# Altium PCB PCB(改版20231122）.PcbDoc
Units mil, origin at the board's own origin, x right, y up, seen from the top; angles counter-clockwise.
Board outline 3903.82 x 2740.03 mil, 2 copper layers (Top Layer, Bottom Layer); 31 components, 55 nets, 141 pads, 3 vias.
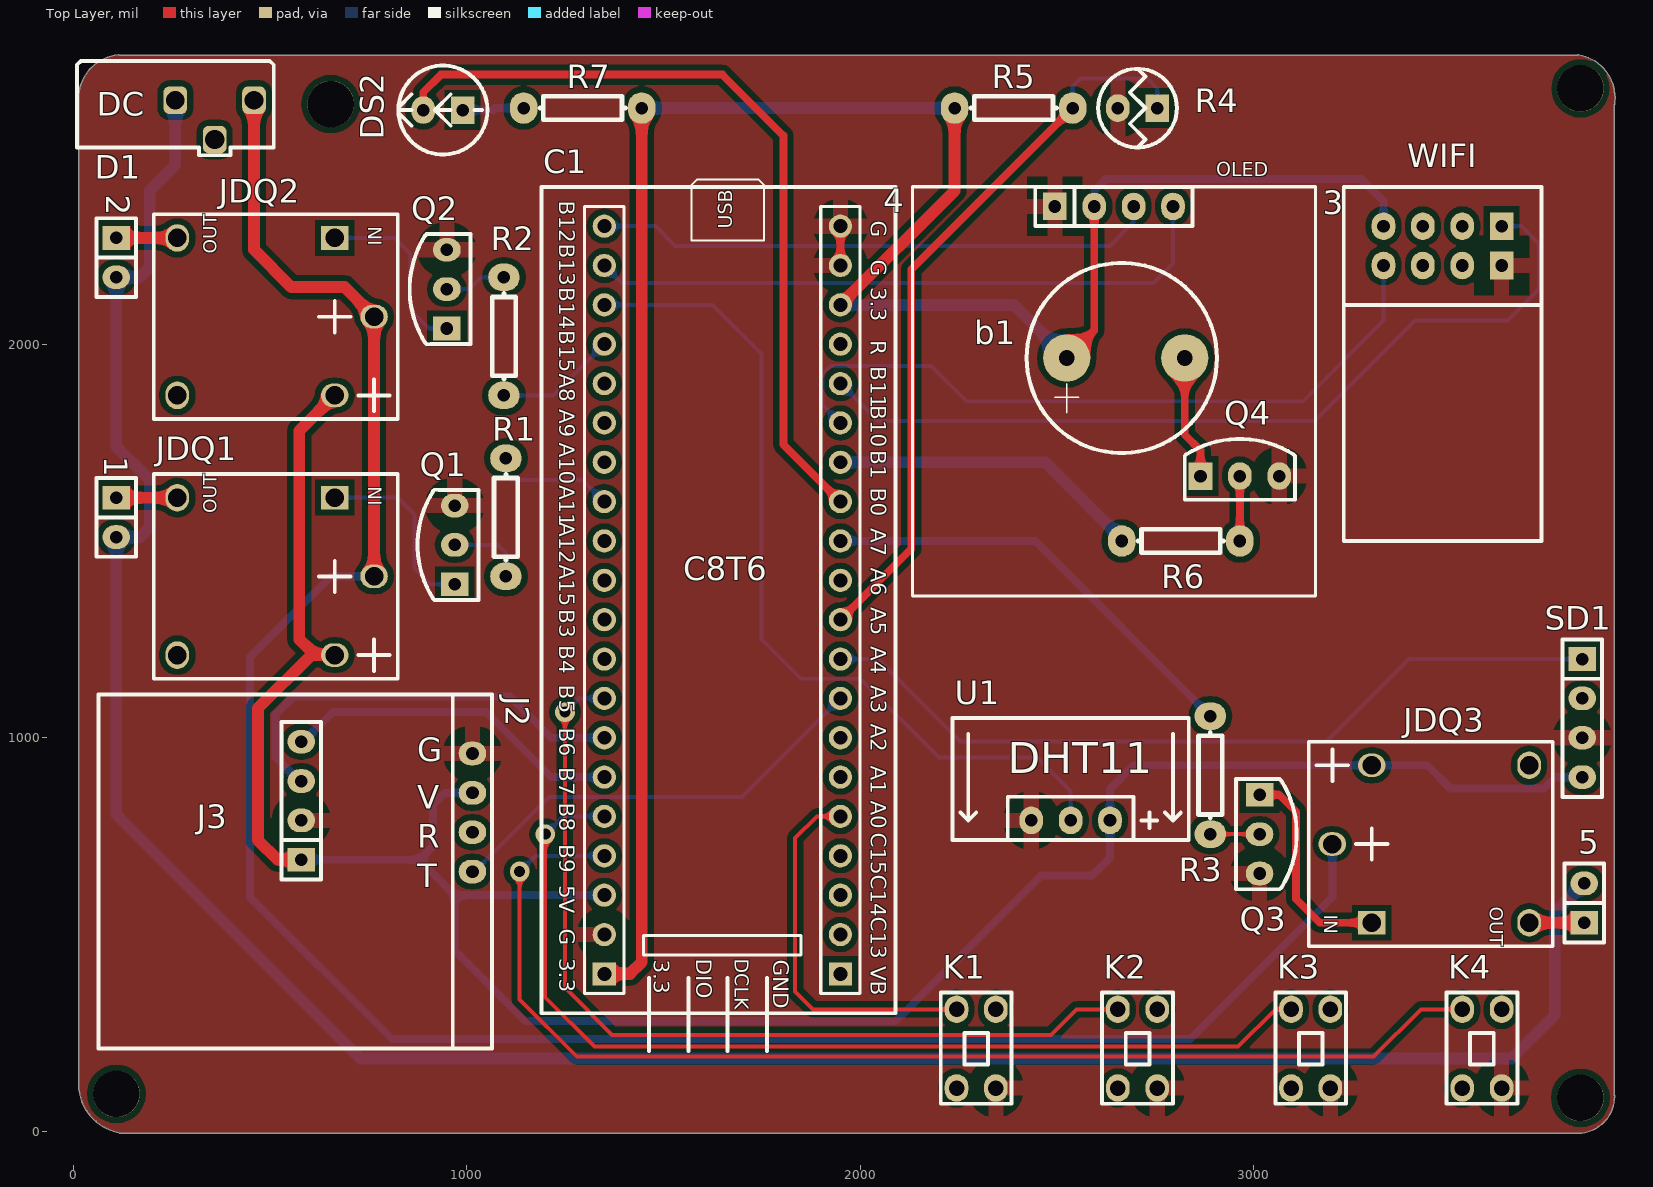
[diagram p0: Top Layer view]
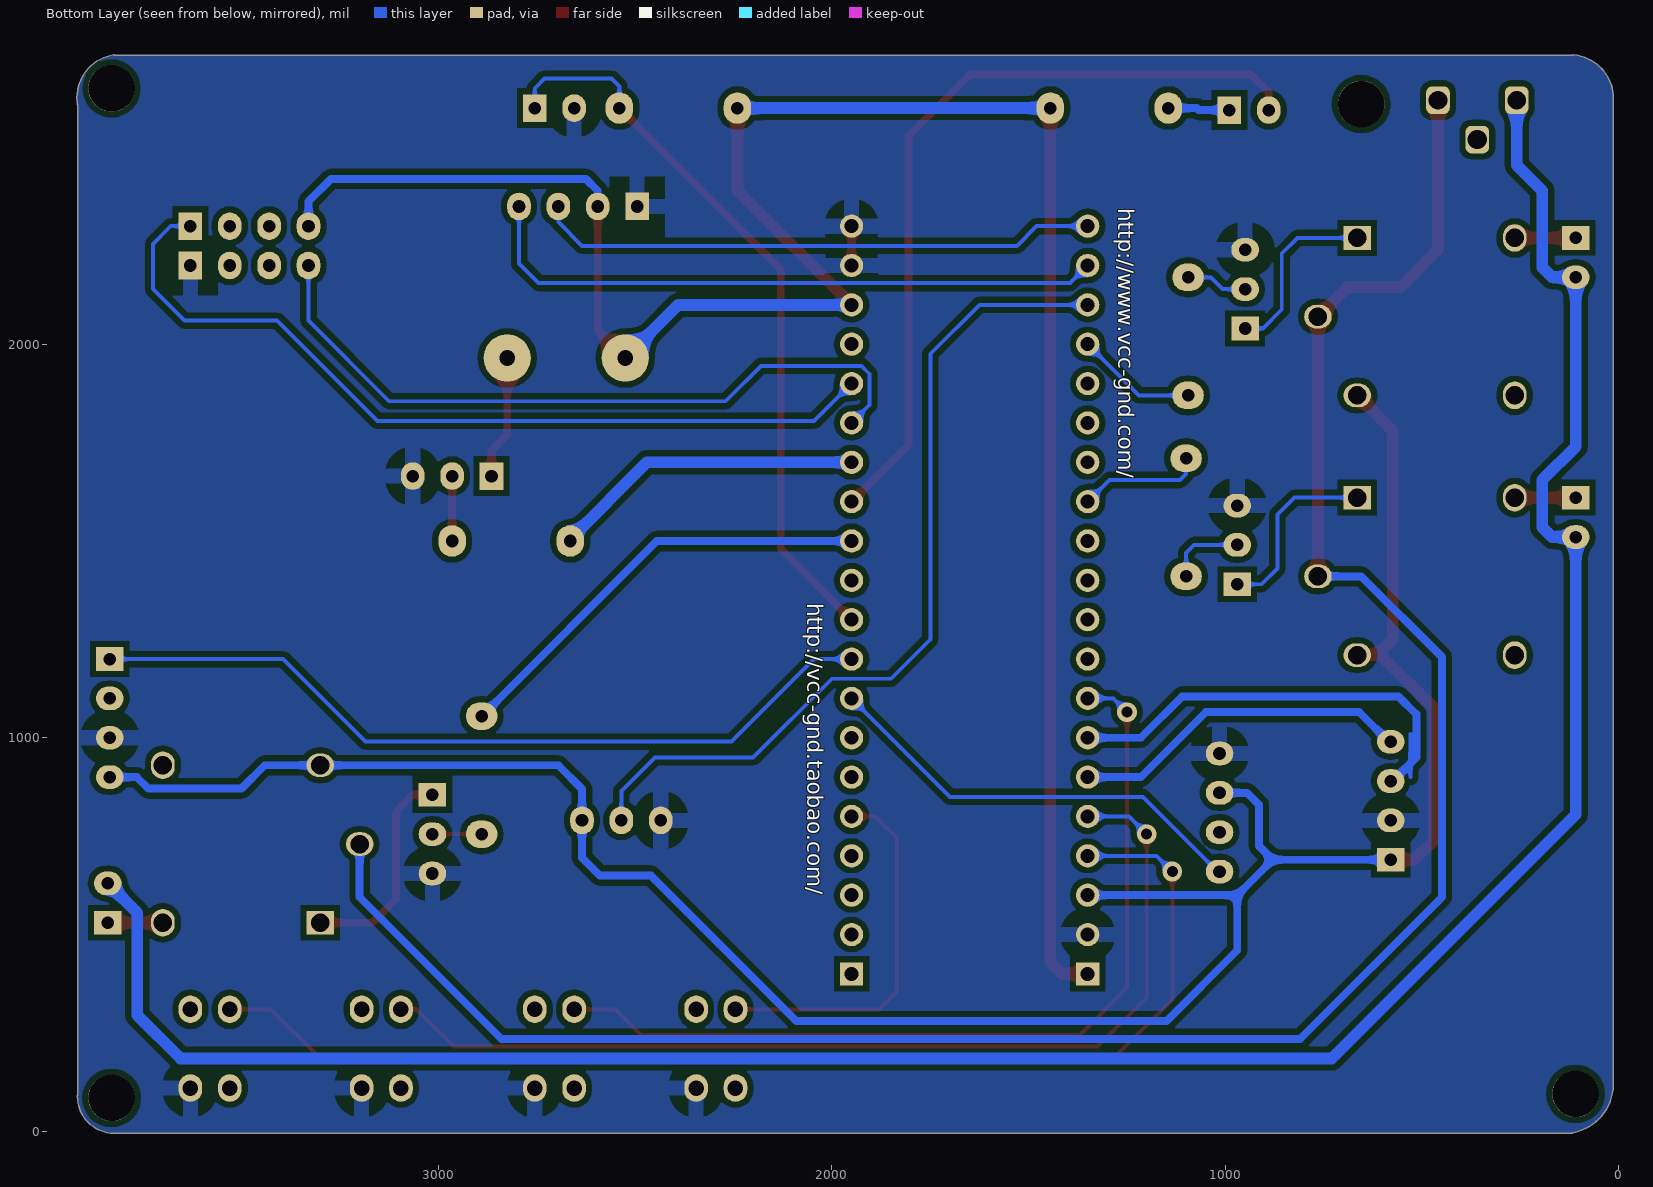
[diagram p1: Bottom Layer view, seen from below]

## Layer stack, top to bottom
Top Solder: solder mask 0.4, Solder Resist, Dk 3.5
Top Layer: signal copper 1.4
Dielectric 1: dielectric 12.6, FR-4, Dk 4.8
Bottom Layer: signal copper 1.4
Bottom Solder: solder mask 0.4, Solder Resist, Dk 3.5

## Board outline
116.43,-3.26 cw(c139.27,119.27) 15,128.92 cw(c20,128.53) 15.16,129.85 15.16,2613.68 cw(c20,2615) 15.01,2614.52 cw(c125,2625) 114.52,2734.99 cw(c115,2730) 116.32,2734.84 3823.68,2734.84 cw(c3825,2730) 3825.79,2734.95 cw(c3808.5,2626.5) 3918.33,2626.5 cw(c3808.5,2626.5) 3916.96,2609.21 cw(c3912.01,2610) 3916.85,2608.68 3916.85,91.32 cw(c3912.01,90) 3917.02,90.08 cw(c3823.5,88.5) 3917.04,88.5 cw(c3823.5,88.5) 3825.08,-5.01 cw(c3825,0) 3823.68,-4.84 131.32,-4.84 cw(c130,0) 129.61,-5 cw(c139.27,119.27) 127.71,-4.84 120,-4.84 cw(c120,0)

## Design rules (kind name [scope] priority, off if disabled: settings)
Clearance [All] p1: gap=15 ignorepadtopadclearanceinfootprint=FALSE
DiffPairsRouting [All] p1: maxlimit=10 minlimit=10 mostfreqgap=10 toplayer_minwidth=15 toplayer_maxwidth=100 toplayer_prefwidth=15 bottomlayer_minwidth=15 bottomlayer_maxwidth=100 bottomlayer_prefwidth=15 maxuncoupledlength=500
PolygonConnect [All] p1: connectstyle=Relief reliefconductorwidth=40 reliefentries=4 polygonreliefangle="90 Angle" airgapwidth=40
RoutingVias [All] p1: holewidth=28 width=50 viastyle="Through Hole" minholewidth=28 minwidth=50 maxholewidth=28 maxwidth=50
SolderMaskExpansion [All] p1: expansion=4
Width Width_3 [InNet('VCC3.3')] p1: maxlimit=100 minlimit=20 preferedwidth=20
Width Width_2 [InNet('VCC')] p2: maxlimit=100 minlimit=20 preferedwidth=20
Width Width_1 [InNet('GND')] p3: maxlimit=100 minlimit=20 preferedwidth=20
Width [All] p4: maxlimit=100 minlimit=10 preferedwidth=20
29 further rules are at their usual default settings.

## Components (designator, comment, footprint, x,y, rotation, side; value= is the part's Value field where it differs from the comment)
1 "排扇" SIP2 110,1560 r270 top
2 "水泵" SIP2 110,2220 r270 top
3 "CK" ESP-01S 3630,2300 r180 top
4 "OLED屏幕" OLED 2645,2350 r0 top
5 "水泵" SIP2 3840,580 r90 top
b1 "BELL" bell 2665,1965 r180 top
C1 "核心板" C8T6核心板 1190,300 r0 top
D1 "DC" DC3.5-1.3 0,2460 r0 top
DS2 "照明灯" "LED - duplicate1" 1060,2715 r180 top
J2 "CON4" JW01 1015,1100 r0 top locked
J3 "CON4" SIP4 580,840 r90 top
JDQ1 "继电器" 5继电器 665,1210 r90 top
JDQ2 "继电器" 5继电器 665,1870 r90 top
JDQ3 "继电器" 5继电器 3300,930 r270 top
K1 "KEY" KeyA 2205,350 r0 top
K2 "KEY" KeyA 2615,350 r0 top
K3 "KEY" KeyA 3055,350 r0 top
K4 "KEY" KeyA 3490,350 r0 top
Q1 "NPN" S9013 970,1390 r90 top
Q2 "NPN" S9013 950,2040 r90 top
Q3 "NPN" S9013 3015,855 r270 top
Q4 "NPN" S9013 2865,1665 r0 top
R1 "330R" AXIAL0.3 1100,1560 r270 top
R2 "330R" AXIAL0.3 1095,2020 r90 top
R3 "330R" AXIAL0.3 2890,905 r270 top
R4 "光敏电阻" GM_R 2825,2660 r180 top
R5 "10K" AXIAL0.3 2390,2600 r180 top
R6 "330R" AXIAL0.3 2815,1500 r0 top
R7 "330欧" AXIAL0.3 1295,2600 r180 top
SD1 "SD" SIP4 3835,1050 r270 top
U1 "DHT11" DHT11 2175,730 r0 top

## Footprints (in the part's own frame and the unit in brackets; to place one, negate y for a bottom-side part, rotate by r counter-clockwise, add the part's x,y. Pads: shape width x height; smd on the part's side, far side on the other; paste and mask are expansions set on the pad)
5继电器 [mil]
  rect 60x70 hole 47: 1(400,0)
  oval 60x70 hole 47: 2(200,-100) 3(0,0)
  oval 70x60 hole 47: 4(400,400) 5(0,400)
  silkscreen extent -60,-160 460,460
AXIAL0.3 [mil]
  oval 70x80 hole 32: 1(-150,0) 2(150,0)
  silkscreen extent -109,-30 109,30
bell [mil]
  round 120 hole 40: 1(-160,0) 2(140,0)
  silkscreen extent -242,-242 242,242
C8T6核心板 [mm]
  round 1.5 hole 0.9: 1(4.064,50.8) 2(4.064,48.26) 3(4.064,45.72) 4(4.064,43.18) 5(4.064,40.64) 6(4.064,38.1) 7(4.064,35.56) 8(4.064,33.02) 9(4.064,30.48) 10(4.064,27.94) 11(4.064,25.4) 12(4.064,22.86) 13(4.064,20.32) 14(4.064,17.78) 15(4.064,15.24) 16(4.064,12.7) 17(4.064,10.16) 18(4.064,7.62) 19(4.064,5.08) 22(19.304,5.08) 23(19.304,7.62) 24(19.304,10.16) 25(19.304,12.7) 26(19.304,15.24) 27(19.304,17.78) 28(19.304,20.32) 29(19.304,22.86) 30(19.304,25.4) 31(19.304,27.94) 32(19.304,30.48) 33(19.304,33.02) 34(19.304,35.56) 35(19.304,38.1) 36(19.304,40.64) 37(19.304,43.18) 38(19.304,45.72) 39(19.304,48.26) 40(19.304,50.8)
  rect 1.5x1.5 hole 0.9: 20(4.064,2.54) 21(19.304,2.54)
  silkscreen extent 0,0 22.86,53.34
DC3.5-1.3 [mil]
  rrect50% 60x70 hole 47.24: 1(460,160) 3(260,160)
  rrect50% 60x70 hole 49.21: 2(360,60)
  silkscreen extent 10,20 510,260
DHT11 [mil]
  oval 60x70 hole 32: 1(460,60) 2(360,60) 3(260,60)
  silkscreen extent 60,10 660,320
ESP-01S [mil]
  oval 60x70 hole 32: 1(300,100) 4(300,0) ""(100,100) ""(100,0) ""(200,0) ""(200,100)
  rect 60x70 hole 32: 2(0,0) 3(0,100)
  silkscreen extent -101,-100 401,800
GM_R [mil]
  rect 60x70 hole 32: 1(70,60)
  oval 60x70 hole 32: 2(170,60)
  silkscreen extent 20,-40 220,160
JW01 [mil]
  oval 70x60 hole 32: 1(0,-440) 2(0,-340) 3(0,-240) 4(0,-140)
  silkscreen extent -950,-890 50,10
KeyA [mil]
  oval 60x70 hole 39.37: 1(40,-40) 2(40,-240) 3(140,-240) 4(140,-40)
  silkscreen extent 0,-280 180,3
"LED - duplicate1" [mil]
  rect 60x70 hole 32: 1(70,120)
  oval 60x70 hole 32: 2(170,120)
  silkscreen extent 7,7 233,233
OLED [mil]
  rect 60x70 hole 32: 1(-150,0)
  oval 60x70 hole 32: 2(-50,0) 3(50,0) 4(150,0)
  silkscreen extent -512,-990 512,50
S9013 [mil]
  oval 60x70 hole 32: B(100,0) E(200,0)
  rect 60x70 hole 32: C(0,0)
  silkscreen extent -40,-60 240,94
SIP2 [mil]
  rect 60x70 hole 32: 1(-50,0)
  oval 60x70 hole 32: 2(50,0)
  silkscreen extent -100,-50 100,50
SIP4 [mil]
  rect 60x70 hole 32: 1(-150,0)
  oval 60x70 hole 32: 2(-50,0) 3(50,0) 4(150,0)
  silkscreen extent -200,-50 200,50

## Part data
2 3 5: library part 排扇
4: library part OLED_4
C1: library part C, "电容"
D1: library part DC3.5-1.3
DS2: library part LED, "Typical RED, GREEN, YELLOW, AMBER GaAs LED"
J2: library part "Header 4", "Header, 4-Pin"
JDQ1 JDQ2 JDQ3: library part 4脚继电器
K1 K2 K3 K4: library part key_4pin
R1: library part 光敏电阻
R2 R3 R4 R5 R6 R7: library part RES0603, "电阻"
SD1: library part 土壤湿度传感器

## Free pads (board coordinates)
  round 118.11 hole 118.11 unplated: 0(110,95) 0(655,2610) 0(3830,85) 0(3830,2650)

## Via types
v1: diameter 50, hole 28, Top Layer to Bottom Layer, 3 vias

## Nets (pads, with @x,y where several pads share a name; then routed paths per layer and width w, separated by ;. In a path a pad name is that pad's centre, name@x,y a point inside that pad or via, vN(x,y) a via of type N, cw(c..) or ccw(c..) an arc to the next point about the centre after c; other vN are vias at no path point)
GND: 3.3 4.1 C1.19 C1.39 C1.40 J2.4 J3.2 K1.3 K2.3 K3.3 K4.3 Q1.E Q2.E Q3.E Q4.E R4.2 SD1.3 U1.3 | length 103.1
  Top Layer w20: C1.39 1949.93,2200.07 1949.93,2299.93 C1.40 ; R4.2@2655,2597 R4.2
GND1: 1.2 2.2 5.2 D1.3 | length 6341.3
  Bottom Layer w30: D1.3 260,2455 195,2390 195,2195 170,2170 2.2 110,1740 195,1655 195,1535 170,1510 1.2 110,805 730,185 3655,185 3765,295 3765,555 5.2
Net1_1: 1.1 JDQ1.4 | length 155
  Top Layer w30: 1.1 JDQ1.4
Net2_1: 2.1 JDQ2.4 | length 155
  Top Layer w30: 2.1 JDQ2.4
Net5_1: 5.1 JDQ3.4 | length 140
  Top Layer w30: JDQ3.4 5.1
Netb1_1: b1.1 Q4.C | length 316.6
  Top Layer w20: b1.1 2825,1770 2865,1730 Q4.C
NetBT1_1: C1.21
NetDJ1_1: 
NetDJ1_2: 
NetDJ1_3: 
NetDJ1_4: 
NetDS2_1: DS2.1 R7.2 | length 157.1
  Bottom Layer w20: DS2.1 1068,2595 1073,2600 R7.2
NetJDQ1_1: JDQ1.1 Q1.C | length 476.4
  Bottom Layer w10: JDQ1.1 825,1610 868,1567 868,1430 908,1390 Q1.C
NetJDQ2_1: JDQ2.1 Q2.C | length 463.5
  Bottom Layer w10: JDQ2.1 817,2270 857,2230 857,2088 905,2040 Q2.C
NetJDQ3_1: JDQ3.1 Q3.C | length 549.7
  Top Layer w20: Q3.C 3065,855 3108,812 3108,590 3168,530 JDQ3.1
NetQ1_B: Q1.B R1.2 | length 198.3
  Bottom Layer w10: Q1.B 1080,1490 1100,1470 R1.2
NetQ2_B: Q2.B R2.2 | length 157.4
  Bottom Layer w10: Q2.B 1007,2140 1037,2170 R2.2
NetQ3_B: Q3.B R3.2 | length 125
  Top Layer w10: R3.2 Q3.B
NetQ4_B: Q4.B R6.2 | length 165
  Top Layer w20: R6.2 Q4.B
PA0: C1.25 K1.1 | length 956.4
  Top Layer w10: C1.25 1890,800 1835,745 1835,355 1880,310 K1.1
PA1: C1.26
PA2: C1.27 | length 10
  Top Layer w10: C1.27 C1.27@1960,1000
PA3: C1.28 J2.1 | length 1117.3
  Bottom Layer w10: J2.1 1020,660 1210,850 1700,850 C1.28
PA4: C1.29 SD1.1 | length 2059
  Bottom Layer w10: C1.29 2045,1200 2255,990 3185,990 3395,1200 SD1.1
PA5: C1.30 R4.1 R5.1 | length 1883
  Top Layer w20: C1.30 2130,1480 2130,2190 R5.1
  Bottom Layer w10: R5.1 2540,2655 2560,2675 2730,2675 2755,2650 R4.1
PA6: C1.31
PA7: C1.32 R3.1 | length 1124.3
  Bottom Layer w20: C1.32 2445,1500 R3.1
PA8: C1.5
PA9: C1.6
PA10: C1.7
PA11: C1.8 R1.1 | length 319
  Bottom Layer w10: R1.1 1100,1670 1115,1655 1295,1655 C1.8
PA12: C1.9
PA15: C1.10
PB0: C1.33 DS2.2 | length 2032.9
  Top Layer w20: DS2.2 890,2640 935,2685 1650,2685 1805,2530 1805,1745 C1.33
PB1: C1.34 R6.1 | length 800.8
  Bottom Layer w30: C1.34 2470,1700 2665,1505 R6.1
PB2: C1.37
PB3: C1.11
PB4: C1.12
PB5: C1.13 K2.1 | length 2296.1
  Top Layer w10: v1(1250,1065) 1250,365 1370,245 2485,245 2550,310 K2.1
  Bottom Layer w10: v1(1250,1065) 1285,1100 C1.13
PB6: C1.14 J3.3 | length 1207
  Top Layer w20: J3.3@575,890 J3.3
  Bottom Layer w10: 530,900 530,935 530,1010
  Bottom Layer w20: J3.3@575,890 530,935 515,950 515,1060 560,1105 1110,1105 1215,1000 C1.14
PB7: C1.15 J3.4 | length 869.4
  Top Layer w20: J3.4 J3.4@585,990
  Bottom Layer w20: J3.4@585,990 660,1065 1050,1065 1215,900 C1.15
PB8: C1.16 K3.1 | length 2576.8
  Top Layer w10: v1(1200,755) 1200,340 1325,215 2960,215 3055,310 K3.1 ; C1.16@1345,795 C1.16
  Bottom Layer w10: v1(1200,755) 1245,800 C1.16
PB9: C1.17 K4.1 | length 3061.3
  Top Layer w10: v1(1135,660) 1135,335 1280,190 3305,190 3425,310 K4.1
  Bottom Layer w10: v1(1135,660) 1175,700 C1.17
PB10: 3.1 C1.35 | length 1839.1
  Bottom Layer w10: C1.35 1905,1845 1905,1925 1925,1945 2180,1945 2270,1855 3125,1855 3330,2060 3.1
PB11: 3.2 C1.36 | length 2181.8
  Bottom Layer w10: C1.36 2045,1805 3155,1805 3410,2060 3645,2060 3725,2140 3725,2255 3680,2300 3.2
PB12: 4.3 C1.1 | length 1430.6
  Bottom Layer w10: C1.1 1480,2300 1530,2250 2635,2250 2695,2310 4.3
PB13: 4.4 C1.2 | length 1629.4
  Bottom Layer w10: C1.2 1395,2155 2745,2155 2795,2205 4.4
PB14: C1.3 U1.2 | length 2196.2
  Bottom Layer w10: C1.3 1625,2100 1750,1975 1750,1250 1850,1150 2000,1150 2200,950 2450,950 2535,865 U1.2
PB15: C1.4 R2.1 | length 308.8
  Bottom Layer w10: R2.1 1220,1870 C1.4
PC13: C1.22
PC14: C1.23
PC15: C1.24
VCC: C1.18 J2.3 J3.1 JDQ1.3 JDQ2.3 JDQ3.3 SD1.4 U1.1 | length 5992.4
  Top Layer w30: J3.1 520,690 470,740 470,1075 605,1210 615,1210 ; JDQ1.3 615,1210 ; JDQ2.3 575,1780 575,1250 615,1210
  Bottom Layer w20: J3.1 880,690 ; J2.3 945,860 915,830 915,725 880,690 ; C1.18 970,600 ; SD1.4 3766,900 3737,871 3500,871 3441,930 JDQ3.3 2695,930 2635,870 U1.1 2635,695 2590,650 2460,650 2090,280 1150,280 970,460 970,600 ; 880,690 970,600
VCC1: D1.1 JDQ1.2 JDQ2.2 JDQ3.2 | length 5613.6
  Top Layer w30: D1.1 460,2240 555,2145 690,2145 JDQ2.2 JDQ1.2
  Bottom Layer w20: JDQ1.2@770,1410 JDQ1.2 655,1410 450,1205 450,595 810,235 2840,235 3200,595 JDQ3.2
VCC3.3: 3.4 4.2 b1.2 C1.20 C1.38 R5.2 R7.1 | length 5611.5
  Top Layer w20: b1.2 2595,2035 4.2
  Top Layer w30: C1.20 1415,400 1445,430 1445,2595 R7.1 ; C1.38 2240,2390 R5.2
  Bottom Layer w20: 4.2 2595,2390 2625,2420 3273,2420 3330,2363 3.4
  Bottom Layer w30: R7.1 R5.2 ; C1.38 2390,2100 b1.2
pads on no net: 3. D1.2 J2.2 JDQ1.5 JDQ2.5 JDQ3.5 K1.2 K1.4 K2.2 K2.4 K3.2 K3.4 K4.2 K4.4 SD1.2

## Polygon pours and split planes (outlines as drawn)
GND on Bottom Layer "GND_L02_P006" (solid, remove dead copper, pour order 6): 116.43,-3.26 cw(c139.27,119.27) 15,128.92 cw(c20,128.53) 15.16,129.85 15.16,2613.68 cw(c20,2615) 15.01,2614.52 cw(c125,2625) 114.52,2734.99 cw(c115,2730) 116.32,2734.84 3823.68,2734.84 cw(c3825,2730) 3825.79,2734.95 cw(c3808.5,2626.5) 3918.33,2626.5 cw(c3808.5,2626.5) 3916.96,2609.21 cw(c3912.01,2610) 3916.85,2608.68 3916.85,91.32 cw(c3912.01,90) 3917.02,90.08 cw(c3823.5,88.5) 3917.04,88.5 cw(c3823.5,88.5) 3825.08,-5.01 cw(c3825,0) 3823.68,-4.84 131.32,-4.84 cw(c130,0) 129.61,-5 cw(c139.27,119.27) 127.71,-4.84 120,-4.84 cw(c120,0)
GND on Top Layer "GND_L01_P007" (solid, remove dead copper, pour order 7): 116.43,-3.26 cw(c139.27,119.27) 15,128.92 cw(c20,128.53) 15.16,129.85 15.16,2613.68 cw(c20,2615) 15.01,2614.52 cw(c125,2625) 114.52,2734.99 cw(c115,2730) 116.32,2734.84 3823.68,2734.84 cw(c3825,2730) 3825.79,2734.95 cw(c3808.5,2626.5) 3918.33,2626.5 cw(c3808.5,2626.5) 3916.96,2609.21 cw(c3912.01,2610) 3916.85,2608.68 3916.85,91.32 cw(c3912.01,90) 3917.02,90.08 cw(c3823.5,88.5) 3917.04,88.5 cw(c3823.5,88.5) 3825.08,-5.01 cw(c3825,0) 3823.68,-4.84 131.32,-4.84 cw(c130,0) 129.61,-5 cw(c139.27,119.27) 127.71,-4.84 120,-4.84 cw(c120,0)

## Silkscreen, mask and mechanical layers (free items; w line width, h text height)
Top Overlay:
  lines w5: 1571.38,2263.66 1571.38,2403.66 1586.38,2418.66 1741.38,2418.66 1756.38,2403.66 1756.38,2263.66 1751.38,2263.66 1571.38,2263.66
  lines w10: 1463.82,204.17 1463.82,389.17 ; 1563.53,204.17 1563.53,389.17 ; 1663.24,204.17 1663.24,389.17 ; 1762.95,204.17 1762.95,389.17
  text "USB" at 1686.38,2293.66 h60 r90
Mechanical 1:
  lines w9.65: 20,128.53 20,2615 ; 115,2730 260,2730 3825,2730 ; 120,0 3825,0 ; 3912.01,90 3912.01,2610
  lines w10: 20,128.53 ccw(c139.27,119.27) 130,0 ; 20,2615 cw(c125,2625) 115,2730 ; 3825,0 ccw(c3823.5,88.5) 3912.01,90 ; 3825,2730 cw(c3808.5,2626.5) 3912.01,2610

## Text inside footprints (layer, text, board x,y; h text height)
3: Top Overlay "WIFI" at 3390,2450 h60
4: Top Overlay "OLED" at 2905,2415 h60
C1: Top Overlay "GND" at 1779,436 h40 r270; Top Overlay "DCLK" at 1682,438 h35 r270; Top Overlay "DIO" at 1584,438 h40 r270; Top Overlay "3.3" at 1476,436 h40 r270; Top Overlay "R" at 2027,2010 h40 r270; Top Overlay "B11" at 2027,1944 h40 r270; Top Overlay "B10" at 2027,1845 h40 r270; Top Overlay "B1" at 2027,1730 h40 r270; Top Overlay "B0" at 2027,1635 h40 r270; Top Overlay "A0" at 2027,840 h40 r270; Top Overlay "A1" at 2027,929 h40 r270; Top Overlay "A2" at 2027,1035.71 h40 r270; Top Overlay "A3" at 2027,1133.57 h40 r270; Top Overlay "A4" at 2027,1233 h40 r270; Top Overlay "A5" at 2027,1331 h40 r270; Top Overlay "A6" at 2027,1432 h40 r270; Top Overlay "C15C14C13" at 2027,758 h40 r270; Top Overlay "A7" at 2027,1532 h40 r270; Top Overlay "VB" at 2027,419 h40 r270; Top Overlay "3.3" at 2027,2145 h40 r270; Top Overlay "G" at 2027,2214 h40 r270; Top Overlay "G" at 2027,2314 h40 r270; Top Overlay "B12" at 1235,2365 h40 r270; Top Overlay "B13" at 1235,2255 h40 r270; Top Overlay "B14" at 1235,2145 h40 r270; Top Overlay "B15" at 1235,2035 h40 r270; Top Overlay "A8" at 1235,1925 h40 r270; Top Overlay "A9" at 1235,1835 h40 r270; Top Overlay "A10" at 1235,1750 h40 r270; Top Overlay "A11" at 1235,1642 h40 r270; Top Overlay "A12" at 1235,1547 h40 r270; Top Overlay "A15" at 1235,1439 h40 r270; Top Overlay "B3" at 1235,1327 h40 r270; Top Overlay "B4" at 1235,1235 h40 r270; Top Overlay "B5" at 1235,1135 h40 r270; Top Overlay "B6" at 1235,1025 h40 r270; Top Overlay "B7" at 1235,925 h40 r270; Top Overlay "B8" at 1235,835 h40 r270; Top Overlay "B9" at 1235,730 h40 r270; Top Overlay "5V" at 1235,625 h40 r270; Top Overlay "G" at 1235,515 h40 r270; Top Overlay "3.3" at 1235,440 h40 r270; Top Overlay "C8T6" at 1550,1400 h60; Bottom Overlay "http://www.vcc-gnd.com/" at 1273,2346 h40 r90; Bottom Overlay "http://vcc-gnd.taobao.com/" at 2062,1342 h40 r90
J2: Top Overlay "T" at 875,620 h60; Top Overlay "R" at 875,720 h60; Top Overlay "V" at 875,820 h60; Top Overlay "G" at 875,940 h60
JDQ1: Top Overlay "OUT" at 365,1570 h34 r90; Top Overlay "IN" at 785,1590 h34 r90
JDQ2: Top Overlay "OUT" at 365,2230 h34 r90; Top Overlay "IN" at 785,2250 h34 r90
JDQ3: Top Overlay "OUT" at 3600,570 h34 r270; Top Overlay "IN" at 3180,550 h34 r270